# EAGLE board ProjBoard (EAGLE 9.7.0)
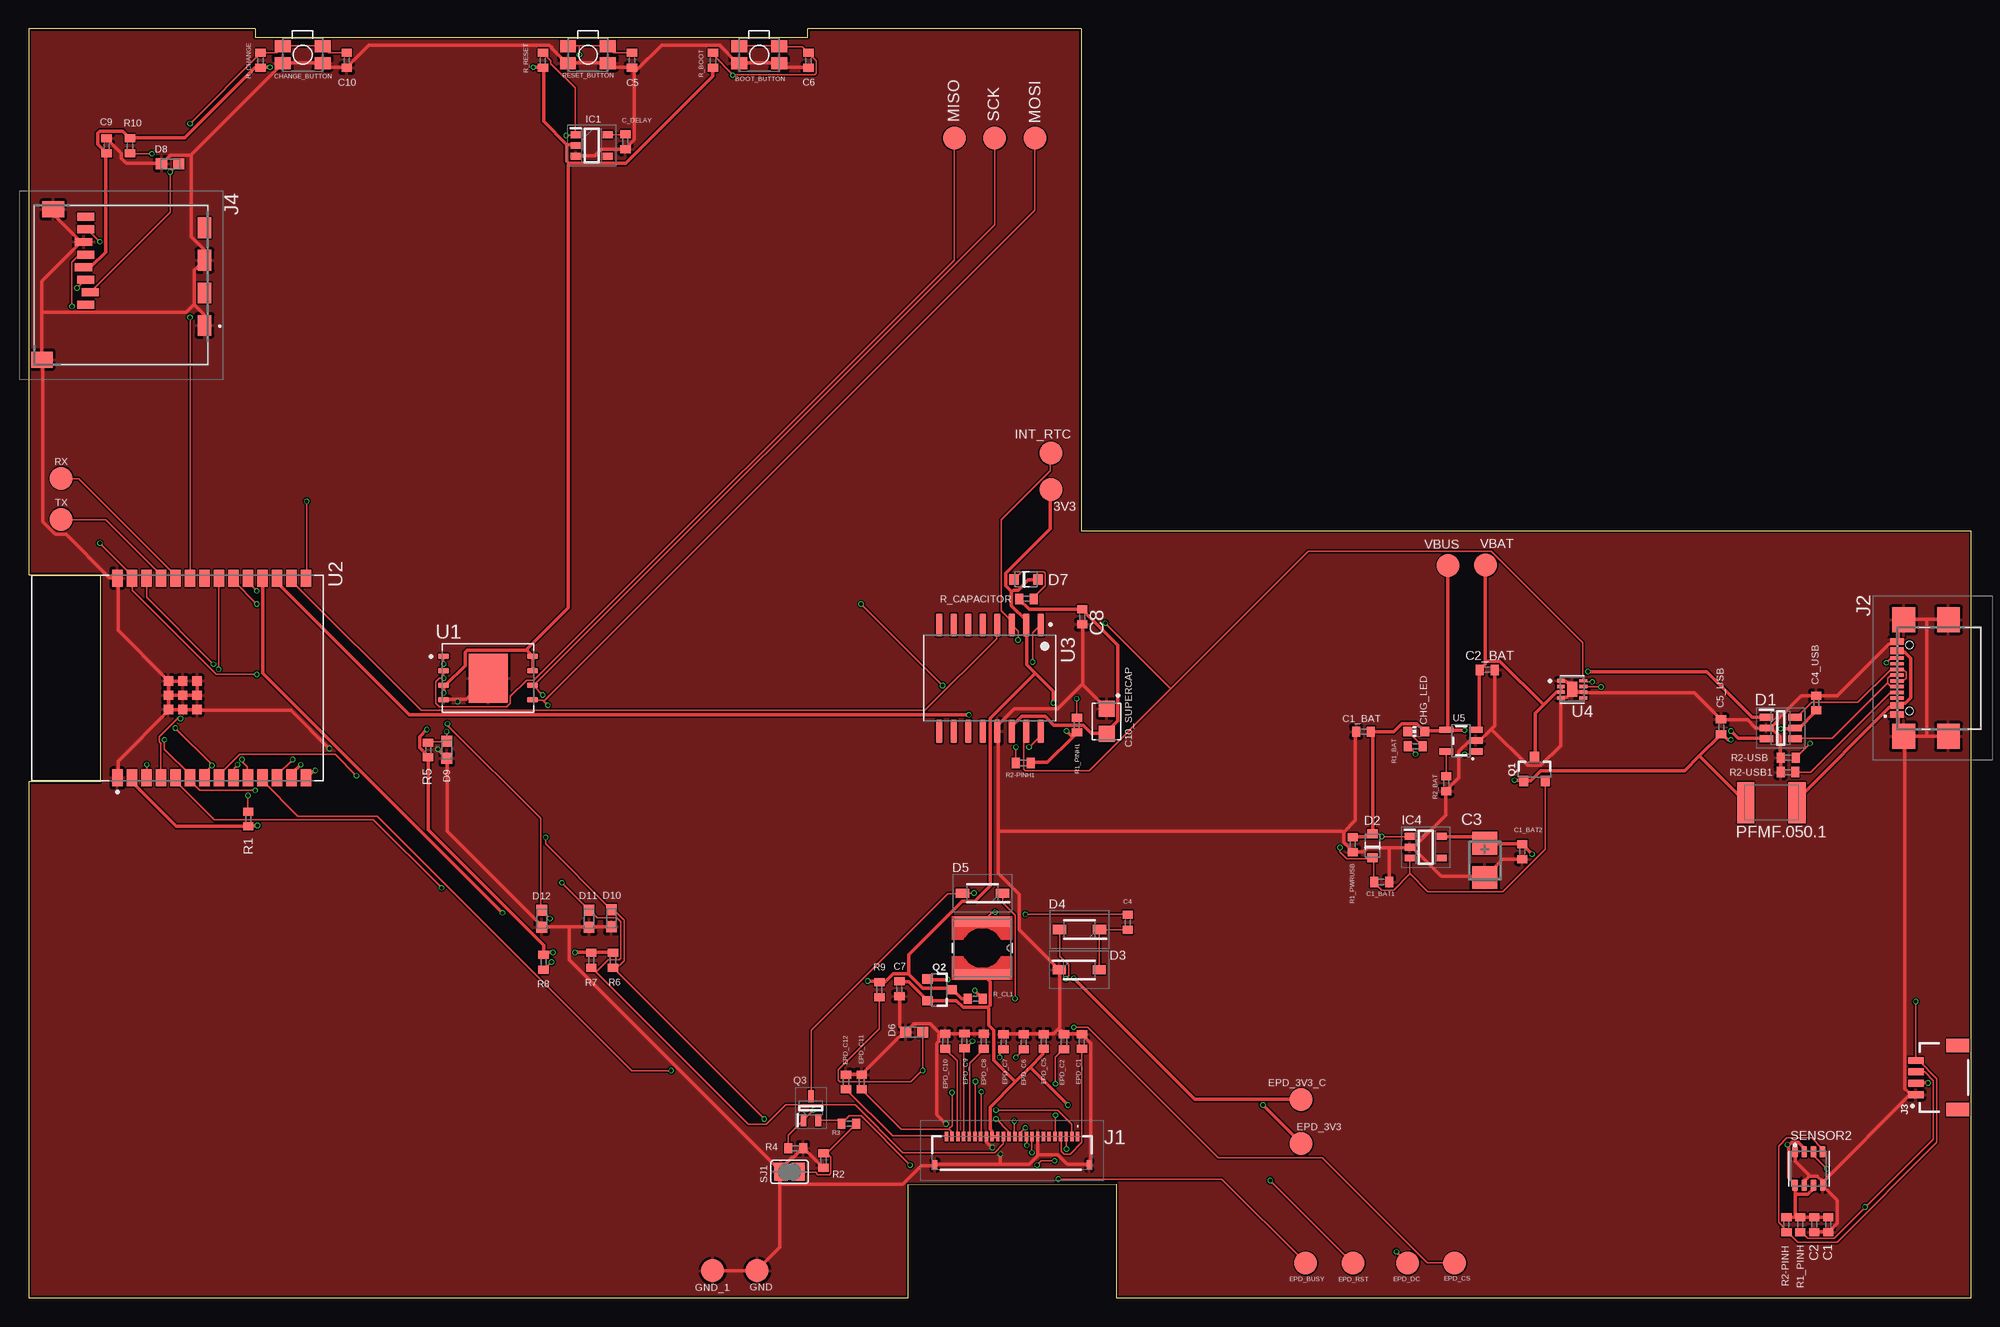
[diagram p0: board, top side]
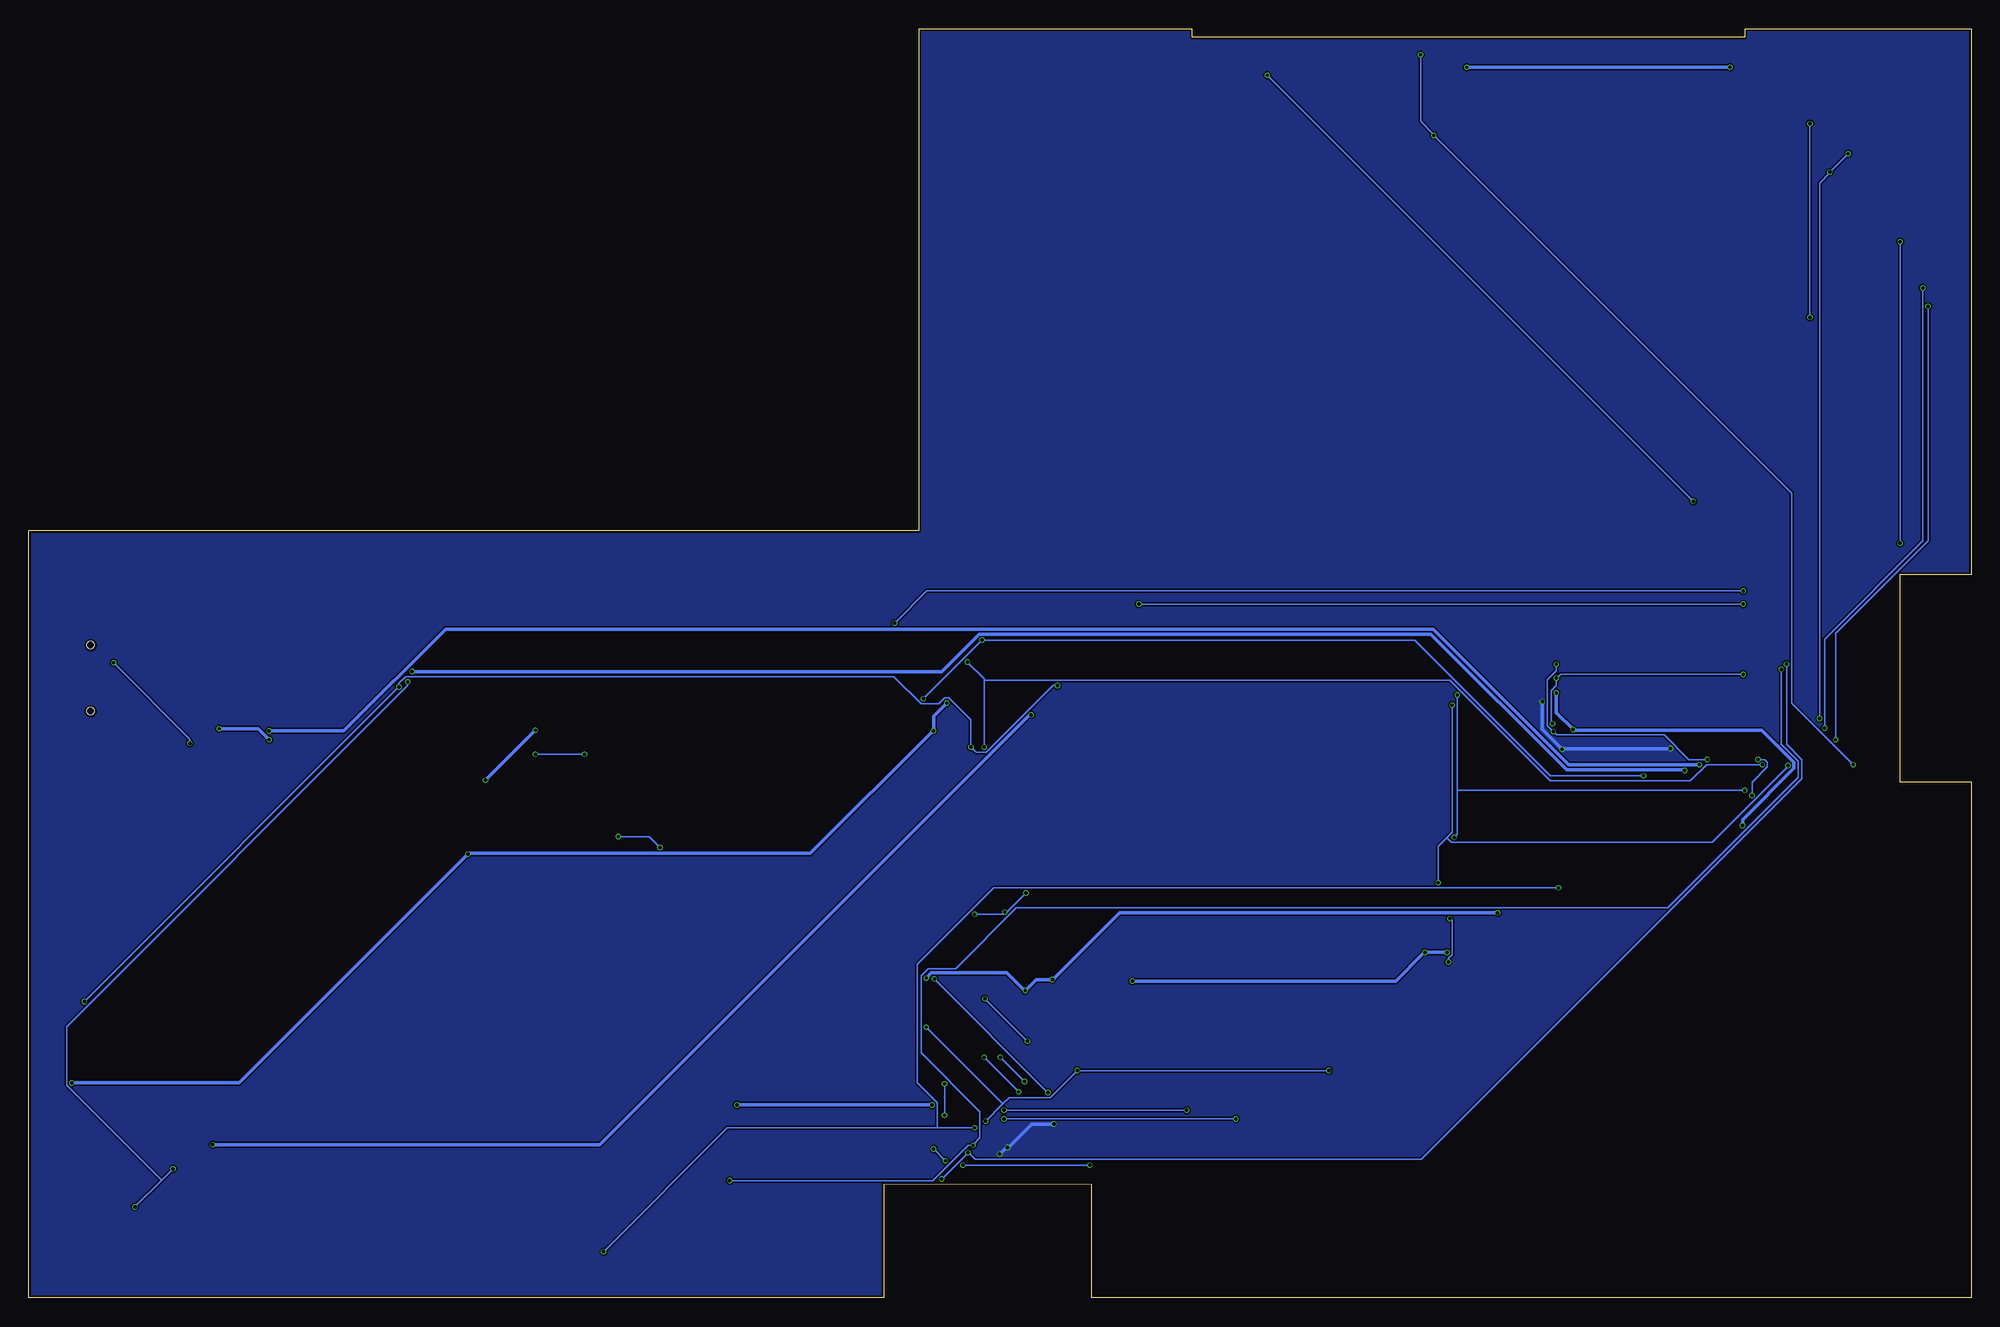
[diagram p1: board, bottom side, seen from below]

Size 170.21 x 111.21 mm. Coordinates in mm from the lower left corner, seen from the top.
Outline: 0,0.02 77.06,0.01 77.07,9.94 95.27,9.96 95.27,0.01 170.21,0 170.21,67.21 92.21,67.21 92.21,111.21 68.26,111.21 68.26,110.46 19.84,110.46 19.84,111.21 0.01,111.21 0.01,63.38 6.3,63.38 6.3,45.24 0.01,45.24 0,0.02
Copper layers (1*16): Top 0.035mm / dielectric 1.6mm / Bottom 0.035mm
Design rules "jlcpcb-2layers.dru": minimum track width 0.13mm, minimum drill 0.3mm, track to track 5mil, track to pad 5mil, pad to pad 5mil, via to via 5mil, smd to smd 5mil, copper to edge 0.2mm, drill to drill 6mil, minimum pad ring 10mil, minimum via ring 3mil, stop-mask expansion 4mil, vias tented up to drill 0mil, thermal gap 10mil
Net classes: 1 pow: width 0.3 mm; 2 rst: width 0.15 mm

## Footprints (pad centres in the part's own frame; a part is rotated, then mirrored left to right if it is on the bottom)
TP20R = smd 2 x 2: TP 0,0
MYBUTTON = smd 1.4 x 1.05: 1 1.75,0.75; 2 -1.75,0.75; 3 -1.75,-0.75; 4 1.75,-0.75
ESP32_WROVER_EAGLE-LTSPICE_C0402 = smd 0.7 x 0.9: 1 -0.65,0; 2 0.65,0
RCL_CT3528 = smd 2 x 2.2: + -1.5,0; - 1.5,0
CAPCP3225X100N = smd 1.4 x 1.4: 1 -1.1,0; 2 1.1,0
ADAFRUIT_CHIP-LED0603 = smd 0.8 x 0.8: A 0,-0.75; C 0,0.75
SOT95P280X145-6N = smd 1.2 x 0.6: 1 -1.25,0.95; 2 -1.25,0; 3 -1.25,-0.95; 4 1.25,-0.95; 5 1.25,0; 6 1.25,0.95
ESP32_WROVER_AVX---SD0805S020S1R0_AVX_SD0805S020S1R0_0 = smd 0.8 x 0.9: 1 -1.05,0; 2 1.05,0
SOD3716X135N = smd 1.15 x 0.8: 1 -1.75,0; 2 1.75,0
DIOC1608X36N = smd 0.97 x 0.94: 1 -0.75,0; 2 0.75,0
SOT95P280X125-5N = smd 0.9 x 0.6: 1 -1.4,0.95; 2 -1.4,0; 3 -1.4,-0.95; 4 1.4,-0.95; 5 1.4,0.95
SOT95P280X120-5N = smd 0.9 x 0.6: 1 -1.4,0.95; 2 -1.4,0; 3 -1.4,-0.95; 4 1.4,-0.95; 5 1.4,0.95
FH34SRJ24S05SH99 = smd 0.3 x 0.8: 1 5.75,1.45; 2 5.25,1.45; 3 4.75,1.45; 4 4.25,1.45; 5 3.75,1.45; 6 3.25,1.45; 7 2.75,1.45; 8 2.25,1.45; 9 1.75,1.45; 10 1.25,1.45; 11 0.75,1.45; 12 0.25,1.45; 13 -0.25,1.45; 14 -0.75,1.45; 15 -1.25,1.45; 16 -1.75,1.45; 17 -2.25,1.45; 18 -2.75,1.45; 19 -3.25,1.45; 20 -3.75,1.45; 21 -4.25,1.45; 22 -4.75,1.45; 23 -5.25,1.45; 24 -5.75,1.45 | smd 0.4 x 0.8: MP1 6.75,-1.05; MP2 -6.75,-1.05
SAMACSYS_PARTS_USB4110GFA = smd 0.3 x 1.15: A1 -3.35,3.678; A4 -2.55,3.678; A5 -1.25,3.678; A6 -0.25,3.678; A7 0.25,3.678; A8 1.25,3.678; A9 2.55,3.678; A12 3.35,3.678; B1 3.05,3.678; B4 2.25,3.678; B5 1.75,3.678; B6 0.75,3.678; B7 -0.75,3.678; B8 -1.75,3.678; B9 -2.25,3.678; B12 -3.05,3.678 | smd 2.18 x 2: MP1 -5.11,-0.827; MP2 5.11,-0.827; MP3 -5.11,3.103; MP4 5.11,3.103 | hole 0.65: -2.89,2.603; 2.89,2.603
JST04_1MM_RA = smd 0.6 x 1.35: 1 -1.5,0; 2 -0.5,0; 3 0.5,0; 4 1.5,0 | smd 1.2 x 2: NC1 2.8,-3.675; NC2 -2.8,-3.675
112ATAARR03ATTEND = smd 1.8 x 1.2: G1 10.6,10.4; G2 4.9,10.4; S1 7.75,10.4; S2 2.05,10.4 | smd 1.4 x 1.9: G3 13.6,-3.85; G4 0.45,-2.85 | smd 0.7 x 1.5: P1 8.8,0; P2 7.7,0.4; P3 6.6,0; P4 5.5,-0.2; P5 4.4,0; P6 3.3,-0.2; P7 2.2,0; P8 1.1,0
IND_4828-WE-TPC_WRE = smd 0.889 x 4.826: 1 -2.286,0; 2 2.286,0
ESP32C6_VARISTOR_CT/CN1812 = smd 1.5 x 3.6: 1 -2.25,0; 2 2.25,0
ESP32_WROVER_SPARKFUN-DISCRETESEMI_SOT23-3 = smd 0.8 x 0.9: 1 -0.95,-1; 2 0.95,-1; 3 0,1.1
SOT65P210X110-3N = smd 1.05 x 0.5: 1 -1.05,0.65; 2 -1.05,-0.65; 3 1.05,0
ESP32_WROVER_EAGLE-LTSPICE_R0402 = smd 0.7 x 0.9: 1 -0.65,0; 2 0.65,0
ESP32_WROVER_BME680_PSON80P300X300X100-8N = smd 1.016 x 0.5: 1 1.458,1.2; 2 1.458,0.4; 3 1.458,-0.4; 4 1.458,-1.2; 5 -1.458,-1.22; 6 -1.458,-0.4; 7 -1.458,0.4; 8 -1.458,1.2
SJ = smd 1.168 x 1.6: 1 -0.762,0; 2 0.762,0
SON127P600X800X80-9N = smd 0.94 x 0.44: 1 -3.895,1.905; 2 -3.895,0.635; 3 -3.895,-0.635; 4 -3.895,-1.905; 5 3.895,-1.905; 6 3.895,-0.635; 7 3.895,0.635; 8 3.895,1.905 | smd 3.4 x 4.3: 9 0,0
XCVR_ESP32-C6-WROOM-1-N8 = smd 1.5 x 0.9: 1 -8.75,5.26; 2 -8.75,3.99; 3 -8.75,2.72; 4 -8.75,1.45; 5 -8.75,0.18; 6 -8.75,-1.09; 7 -8.75,-2.36; 8 -8.75,-3.63; 9 -8.75,-4.9; 10 -8.75,-6.17; 11 -8.75,-7.44; 12 -8.75,-8.71; 13 -8.75,-9.98; 14 -8.75,-11.25; 15 8.75,-11.25; 16 8.75,-9.98; 17 8.75,-8.71; 18 8.75,-7.44; 19 8.75,-6.17; 20 8.75,-4.9; 21 8.75,-3.63; 22 8.75,-2.36; 23 8.75,-1.09; 24 8.75,0.18; 25 8.75,1.45; 26 8.75,2.72; 27 8.75,3.99; 28 8.75,5.26 | smd 0.8 x 0.8: 29_1 -2.755,0.79; 29_2 -1.505,0.79; 29_3 -0.255,0.79; 29_4 -2.755,-0.46; 29_5 -1.505,-0.46; 29_6 -0.255,-0.46; 29_7 -2.755,-1.71; 29_8 -1.505,-1.71; 29_9 -0.255,-1.71
SOIC127P1032X265-16N = smd 2.05 x 0.59: 1 -4.655,4.445; 2 -4.655,3.175; 3 -4.655,1.905; 4 -4.655,0.635; 5 -4.655,-0.635; 6 -4.655,-1.905; 7 -4.655,-3.175; 8 -4.655,-4.445; 9 4.655,-4.445; 10 4.655,-3.175; 11 4.655,-1.905; 12 4.655,-0.635; 13 4.655,0.635; 14 4.655,1.905; 15 4.655,3.175; 16 4.655,4.445
SON50P200X200X80-9N = smd 0.76 x 0.3: 1 -0.985,0.75; 2 -0.985,0.25; 3 -0.985,-0.25; 4 -0.985,-0.75; 6 0.985,-0.25 | smd 0.76 x 0.27: 5 0.985,-0.75; 7 0.985,0.25; 8 0.985,0.75 | smd 0.9 x 1.3: 9 0,0
ESP32_WROVER_SPARKFUN-IC-POWER_SOT23-5 = smd 0.55 x 1.2: 1 -0.95,-1.3; 2 0,-1.3; 3 0.95,-1.3; 4 0.95,1.3; 5 -0.95,1.3

## Placement (x,y rotation side)
3V3  TPTP20R  [TP20R]  89.57,70.82 0 top
BOOT_BUTTON  BUTTON_CUSYOMV1  [MYBUTTON]  64.01,108.92 180 top
C1  100nF  [ESP32_WROVER_EAGLE-LTSPICE_C0402]  157.67,6.43 270 top
C1_BAT  4.7uF  [ESP32_WROVER_EAGLE-LTSPICE_C0402]  116.95,49.61 180 top
C1_BAT1  4.7uF  [ESP32_WROVER_EAGLE-LTSPICE_C0402]  118.54,36.44 0 top
C1_BAT2  4.7uF  [ESP32_WROVER_EAGLE-LTSPICE_C0402]  130.86,39.1 270 top
C2  100nF  [ESP32_WROVER_EAGLE-LTSPICE_C0402]  156.43,6.43 270 top
C2_BAT  4.7uF  [ESP32_WROVER_EAGLE-LTSPICE_C0402]  127.8,55.02 0 top
C3  100uF TANT  [RCL_CT3528]  127.58,38.33 270 top
C4  4.7uF/25V  [ESP32_WROVER_EAGLE-LTSPICE_C0402]  96.3,32.91 90 top
C4_USB  100nF  [ESP32_WROVER_EAGLE-LTSPICE_C0402]  156.62,52.12 90 top
C5  1uF  [ESP32_WROVER_EAGLE-LTSPICE_C0402]  52.87,108.42 270 top
C5_USB  4.7uF  [ESP32_WROVER_EAGLE-LTSPICE_C0402]  148.28,50.03 90 top
C6  100nF  [ESP32_WROVER_EAGLE-LTSPICE_C0402]  68.33,108.42 270 top
C7  10uF  [ESP32_WROVER_EAGLE-LTSPICE_C0402]  76.29,27.08 270 top
C8  100nF  [ESP32_WROVER_EAGLE-LTSPICE_C0402]  92.32,59.67 270 top
C9  100nF  [ESP32_WROVER_EAGLE-LTSPICE_C0402]  6.84,100.93 90 top
C10  100nF  [ESP32_WROVER_EAGLE-LTSPICE_C0402]  27.87,108.42 270 top
C10_SUPERCAP  CPH3225A  [CAPCP3225X100N]  94.44,50.52 270 top
C_DELAY  100nF  [ESP32_WROVER_EAGLE-LTSPICE_C0402]  52.29,101.29 270 top
CHANGE_BUTTON  BUTTON_CUSYOMV1  [MYBUTTON]  24.01,108.92 180 top
CHG_LED  [ADAFRUIT_CHIP-LED0603]  121.57,49.63 90 top
D1  USBLC6-2SC6Y  [SOT95P280X145-6N]  153.5,49.93 0 top
D2  ESP32_WROVER_AVX---SD0805S020S1R0_AVX_SD0805S020S1R0_0_0AVX_SD0805S020S1R0_0_0  [ESP32_WROVER_AVX---SD0805S020S1R0_AVX_SD0805S020S1R0_0]  117.74,39.62 90 top
D3  MBR0530  [SOD3716X135N]  92.04,28.74 0 top
D4  MBR0530  [SOD3716X135N]  92.07,32.28 180 top
D5  MBR0530  [SOD3716X135N]  83.57,35.46 180 top
D6  PGB1010603MR  [DIOC1608X36N]  77.58,23.28 0 top
D7  ESP32_WROVER_AVX---SD0805S020S1R0_AVX_SD0805S020S1R0_0_0AVX_SD0805S020S1R0_0_0  [ESP32_WROVER_AVX---SD0805S020S1R0_AVX_SD0805S020S1R0_0]  87.38,62.95 0 top
D8  PGB1010603MR  [DIOC1608X36N]  12.4,99.36 0 top
D9  PGB1010603MR  [DIOC1608X36N]  36.64,48.02 90 top
D10  PGB1010603MR  [DIOC1608X36N]  51.06,33.26 90 top
D11  PGB1010603MR  [DIOC1608X36N]  49.1,33.21 90 top
D12  PGB1010603MR  [DIOC1608X36N]  44.96,33.22 90 top
EPD_3V3  TPTP20R  [TP20R]  111.49,13.53 0 top
EPD_3V3_C  TPTP20R  [TP20R]  111.49,17.38 0 top
EPD_BUSY  TPTP20R  [TP20R]  111.87,3.06 0 top
EPD_C1  1uF/50V  [ESP32_WROVER_EAGLE-LTSPICE_C0402]  92.28,22.47 90 top
EPD_C2  1uF/50V  [ESP32_WROVER_EAGLE-LTSPICE_C0402]  90.71,22.45 90 top
EPD_C5  0.1uF/50V  [ESP32_WROVER_EAGLE-LTSPICE_C0402]  88.93,22.47 270 top
EPD_C6  1uF/50V  [ESP32_WROVER_EAGLE-LTSPICE_C0402]  87.18,22.44 270 top
EPD_C7  1uF/50V  [ESP32_WROVER_EAGLE-LTSPICE_C0402]  85.42,22.44 270 top
EPD_C8  1uF/50V  [ESP32_WROVER_EAGLE-LTSPICE_C0402]  83.68,22.49 270 top
EPD_C9  1uF/50V  [ESP32_WROVER_EAGLE-LTSPICE_C0402]  81.99,22.52 270 top
EPD_C10  1uF/50V  [ESP32_WROVER_EAGLE-LTSPICE_C0402]  80.3,22.49 270 top
EPD_C11  1uF/50V  [ESP32_WROVER_EAGLE-LTSPICE_C0402]  72.99,18.92 270 top
EPD_C12  1uF/50V  [ESP32_WROVER_EAGLE-LTSPICE_C0402]  71.61,18.92 270 top
EPD_CS  TPTP20R  [TP20R]  124.93,3.06 0 top
EPD_DC  TPTP20R  [TP20R]  120.82,3.06 0 top
EPD_RST  TPTP20R  [TP20R]  116.04,3.06 0 top
GND  TPTP20R  [TP20R]  63.83,2.39 0 top
GND_1  TPTP20R  [TP20R]  59.92,2.39 0 top
IC1  BD5229G-TR  [SOT95P280X125-5N]  49.34,100.96 0 top
IC4  XC6220A331MR-G  [SOT95P280X120-5N]  122.4,39.5 0 top
INT_RTC  TPTP20R  [TP20R]  89.57,74.02 0 top
J1  FH34SRJ-24S-0.5SH_99_  [FH34SRJ24S05SH99]  86.16,12.7 0 top
J2  SAMACSYS_PARTS_USB4110-GF-A  [SAMACSYS_PARTS_USB4110GFA]  167.37,54.31 90 top
J3  QWIIC_RIGHT_ANGLE  [JST04_1MM_RA]  165.33,19.31 90 top
J4  112A-TAAR-R03_ATTEND  [112ATAARR03ATTEND]  5.02,95.81 270 top
L1  68uH  [IND_4828-WE-TPC_WRE]  83.54,30.66 270 top
MISO  TPTP20R  [TP20R]  81.11,101.6 90 top
MOSI  TPTP20R  [TP20R]  88.19,101.6 90 top
PFMF.050.1  ESP32C6_VARISTORCN1812  [ESP32C6_VARISTOR_CT/CN1812]  152.68,43.4 180 top
Q1  20V/4.2A/52mΩ/1.4W  [ESP32_WROVER_SPARKFUN-DISCRETESEMI_SOT23-3]  131.93,46.29 0 top
Q2  20V/4.2A/52mΩ/1.4W  [ESP32_WROVER_SPARKFUN-DISCRETESEMI_SOT23-3]  79.76,27 270 top
Q3  SI1308EDL-T1-GE3  [SOT65P210X110-3N]  68.54,16.64 90 top
R1  10K  [ESP32_WROVER_EAGLE-LTSPICE_R0402]  19.25,41.96 90 top
R1_BAT  200  [ESP32_WROVER_EAGLE-LTSPICE_R0402]  121.49,48.33 0 top
R1_PINH  10K  [ESP32_WROVER_EAGLE-LTSPICE_R0402]  155.22,6.43 90 top
R1_PINH1  10K  [ESP32_WROVER_EAGLE-LTSPICE_R0402]  91.84,50.19 270 top
R1_PWRUSB  100K  [ESP32_WROVER_EAGLE-LTSPICE_R0402]  116,39.72 90 top
R2  2.2  [ESP32_WROVER_EAGLE-LTSPICE_R0402]  69.64,12.05 90 top
R2-PINH  10K  [ESP32_WROVER_EAGLE-LTSPICE_R0402]  154,6.43 90 top
R2-PINH1  10K  [ESP32_WROVER_EAGLE-LTSPICE_R0402]  87.14,46.87 0 top
R2-USB  5k1  [ESP32_WROVER_EAGLE-LTSPICE_R0402]  154.15,47.33 180 top
R2-USB1  5K1  [ESP32_WROVER_EAGLE-LTSPICE_R0402]  154.14,46.07 0 top
R2_BAT  2K  [ESP32_WROVER_EAGLE-LTSPICE_R0402]  124.2,45.06 90 top
R3  0.47  [ESP32_WROVER_EAGLE-LTSPICE_R0402]  71.87,15.27 0 top
R4  10K  [ESP32_WROVER_EAGLE-LTSPICE_R0402]  67.21,13.12 0 top
R5  10K  [ESP32_WROVER_EAGLE-LTSPICE_R0402]  35,48.01 270 top
R6  10K  [ESP32_WROVER_EAGLE-LTSPICE_R0402]  51.2,29.59 90 top
R7  10K  [ESP32_WROVER_EAGLE-LTSPICE_R0402]  49.3,29.59 90 top
R8  10K  [ESP32_WROVER_EAGLE-LTSPICE_R0402]  45.12,29.41 90 top
R9  10K  [ESP32_WROVER_EAGLE-LTSPICE_R0402]  74.54,27 90 top
R10  10K  [ESP32_WROVER_EAGLE-LTSPICE_R0402]  8.89,100.93 90 top
R_BOOT  10K  [ESP32_WROVER_EAGLE-LTSPICE_R0402]  59.96,108.42 90 top
R_CAPACITOR  15  [ESP32_WROVER_EAGLE-LTSPICE_R0402]  87.42,61.24 0 top
R_CHANGE  10K  [ESP32_WROVER_EAGLE-LTSPICE_R0402]  20.32,108.42 90 top
R_CL1  10K  [ESP32_WROVER_EAGLE-LTSPICE_R0402]  82.95,26.22 0 top
R_RESET  10K  [ESP32_WROVER_EAGLE-LTSPICE_R0402]  45.06,108.42 90 top
RESET_BUTTON  BUTTON_CUSYOMV1  [MYBUTTON]  49.01,108.92 180 top
RX  TPTP20R  [TP20R]  2.86,71.81 0 top
SCK  TPTP20R  [TP20R]  84.63,101.6 90 top
SENSOR2  BME688  [ESP32_WROVER_BME680_PSON80P300X300X100-8N]  155.96,11.34 90 top
SJ1  [SJ]  66.67,11.05 0 top
TX  TPTP20R  [TP20R]  2.86,68.22 0 top
U1  W25Q512JVEIQ  [SON127P600X800X80-9N]  40.26,54.31 0 top
U2  ESP32-C6-WROOM-1-N8  [XCVR_ESP32-C6-WROOM-1-N8]  13.05,54.31 90 top
U3  DS3231SN#  [SOIC127P1032X265-16N]  84.22,54.31 270 top
U4  MAX17048G+T10  [SON50P200X200X80-9N]  135.23,53.32 0 top
U5  MCP73831  [ESP32_WROVER_SPARKFUN-IC-POWER_SOT23-5]  125.5,48.83 90 top
VBAT  TPTP20R  [TP20R]  127.64,64.2 0 top
VBUS  TPTP20R  [TP20R]  124.37,64.19 0 top

## Library data of the parts
3V3 BOOT_BUTTON CHANGE_BUTTON CHG_LED EPD_3V3 EPD_3V3_C EPD_BUSY EPD_CS EPD_DC EPD_RST GND GND_1 INT_RTC MISO MOSI PFMF.050.1 RESET_BUTTON RX SCK SJ1 TX VBAT VBUS = ProjectLib
C1 C1_BAT C1_BAT1 C1_BAT2 C2 C2_BAT C4 C4_USB C5 C5_USB C6-C10 C_DELAY EPD_C1 EPD_C2 EPD_C5-EPD_C12 = ProjectLib; SPICEMODEL: NONE; SPICEPREFIX: C
C3 = ProjectLib; SPICEPREFIX: C
C10_SUPERCAP = ProjectLib; AVAILABILITY: Not in stock; CHECK_PRICES: https://www.snapeda.com/parts/CPH3225A/Seiko+Instruments/view-part/?ref=eda; DESCRIPTION: 11 mF (EDLC) Supercapacitor 3.3 V 1210 (3225 Metric) - -; MF: Seiko Instruments; MP: CPH3225A; PACKAGE: 1210 Seiko; PRICE: None; PURCHASE-URL: https://www.snapeda.com/api/url_track_click_mouser/?unipart_id=562593&manufacturer=Seiko Instruments&part_name=CPH3225A&search_term=None; SNAPEDA_LINK: https://www.snapeda.com/parts/CPH3225A/Seiko+Instruments/view-part/?ref=snap
D1 = ProjectLib; AVAILABILITY: In Stock; CHECK_PRICES: https://www.snapeda.com/parts/USBLC6-2SC6Y/STMicroelectronics/view-part/?ref=eda; DESCRIPTION: 17V Clamp 5A (8/20µs) Ipp Tvs Diode Surface Mount SOT-23-6; MF: STMicroelectronics; MP: USBLC6-2SC6Y; PACKAGE: SOT-23-6 STMicroelectronics; PRICE: None; SNAPEDA_LINK: https://www.snapeda.com/parts/USBLC6-2SC6Y/STMicroelectronics/view-part/?ref=snap
D2 D7 = ProjectLib; CENTROID_NOT_SPECIFIED: No; DATASHEET: http://datasheets.avx.com/schottky.pdf; DIGIKEY_DESCRIPTION: DIODE SCHOTTKY 20V 1A 0805; DIGIKEY_PART_NUMBER: 478-7800-1-ND; LEAD_FREE: yes; MF: AVX; MOUSER_PART_NUMBER: 581-SD0805S020S1R0; PACKAGE: 0805 (2012 metric); PREFIX: D; ROHS: yes; TEMPERATURE_RANGE_HIGH: +125°C; TEMPERATURE_RANGE_LOW: -55°C
D3-D5 = ProjectLib; AVAILABILITY: In Stock; CHECK_PRICES: https://www.snapeda.com/parts/MBR0530/Onsemi/view-part/?ref=eda; DESCRIPTION: Diode Schottky 30 V 500mA Surface Mount SOD-123; MF: ON Semiconductor; MP: MBR0530; PACKAGE: SOD-123-2 ON Semiconductor; PRICE: None; PURCHASE-URL: https://www.snapeda.com/api/url_track_click_mouser/?unipart_id=179458&manufacturer=ON Semiconductor&part_name=MBR0530&search_term=None; SNAPEDA_LINK: https://www.snapeda.com/parts/MBR0530/Onsemi/view-part/?ref=snap
D6 D8-D12 = ProjectLib; AVAILABILITY: In Stock; CHECK_PRICES: https://www.snapeda.com/parts/PGB1010603MR/Littelfuse/view-part/?ref=eda; DESCRIPTION: 150V (Typ) Clamp - Ipp Tvs Diode Surface Mount 0603 (1608 Metric); MF: Littelfuse Inc.; MP: PGB1010603MR; PACKAGE: 0603 Littelfuse Inc.; PRICE: None; PURCHASE-URL: https://www.snapeda.com/api/url_track_click_mouser/?unipart_id=5659453&manufacturer=Littelfuse Inc.&part_name=PGB1010603MR&search_term=None; SNAPEDA_LINK: https://www.snapeda.com/parts/PGB1010603MR/Littelfuse/view-part/?ref=snap
IC1 = ProjectLib; DESCRIPTION: Voltage Detector with Adjustable Delay Time: CMOS processes are utilized to develop high precision, low current consumption CMOS reset ICs that allow arbitrary setting of the delay time. The extensive lineup includes both Nch Open Drain and CMOS output types in a wide range of detection voltages (from 2.3V to 6.0V, in 0.1V steps), enabling selection of the ideal solution based on customer requirements. In addition, the entire series is of course both lead-free and RoHS-compliant.; HEIGHT: 1.25mm; MANUFACTURER_NAME: ROHM Semiconductor; MANUFACTURER_PART_NUMBER: BD5229G-TR; MOUSER_PART_NUMBER: 755-BD5229G-TR; MOUSER_PRICE-STOCK: https://www.mouser.co.uk/ProductDetail/ROHM-Semiconductor/BD5229G-TR?qs=4kLU8WoGk0vvnhrrYwdszw%3D%3D
IC4 = ProjectLib; DESCRIPTION: LDO Voltage Regulators; HEIGHT: 1.2mm; MANUFACTURER_NAME: Torex; MANUFACTURER_PART_NUMBER: XC6220A331MR-G; MOUSER_PART_NUMBER: 865-XC6220A331MR-G; MOUSER_PRICE-STOCK: https://www.mouser.co.uk/ProductDetail/Torex-Semiconductor/XC6220A331MR-G?qs=AsjdqWjXhJ8ZSWznL1J0gg%3D%3D
J1 = ProjectLib; DESCRIPTION: 24 Position FFC, FPC Connector Contacts, Top and Bottom 0.020" (0.50mm) Surface Mount, Right Angle; HEIGHT: 1.1mm; MANUFACTURER_NAME: Hirose; MANUFACTURER_PART_NUMBER: FH34SRJ-24S-0.5SH(99); MOUSER_PART_NUMBER: 798-FH34SRJ24S05SH99; MOUSER_PRICE-STOCK: https://www.mouser.co.uk/ProductDetail/Hirose-Connector/FH34SRJ-24S-0.5SH99?qs=vcbW%252B4%252BSTIpKBl5ap9J8Fw%3D%3D
J2 = ProjectLib; DESCRIPTION: CONN USB 2.0 TYPE-C R/A SMT; HEIGHT: 3.26mm; MANUFACTURER_NAME: GCT (GLOBAL CONNECTOR TECHNOLOGY); MANUFACTURER_PART_NUMBER: USB4110-GF-A; MOUSER_PART_NUMBER: 640-USB4110-GF-A; MOUSER_PRICE-STOCK: https://www.mouser.co.uk/ProductDetail/GCT/USB4110-GF-A?qs=KUoIvG%2F9IlYiZvIXQjyJeA%3D%3D
J3 = ProjectLib; PROD_ID: CONN-13694
J4 = ProjectLib; DESCRIPTION: Micro SD Card Socket, Push-Push Type, Top Mount, SMT, H=1.83mm, 10u; HEIGHT: 1.9mm; MANUFACTURER_NAME: ATTEND; MANUFACTURER_PART_NUMBER: 112A-TAAR-R03 ATTEND
L1 = ProjectLib; COPYRIGHT: Copyright (C) 2024 Ultra Librarian. All rights reserved.; MANUFACTURER_PART_NUMBER: 744043680; MFR_NAME: Wurth Electronics
Q1 Q2 = ProjectLib; PROD_ID: TRAN-14388
Q3 = ProjectLib; AVAILABILITY: In Stock; CHECK_PRICES: https://www.snapeda.com/parts/SI1308EDL-T1-GE3/Vishay+Siliconix/view-part/?ref=eda; DESCRIPTION: Si1308EDL-T1-GE3 N-channel MOSFET Transistor, 1.5 A, 30 V, 3-Pin SC-70 | Siliconix / Vishay SI1308EDL-T1-GE3; MF: Vishay Siliconix; MP: SI1308EDL-T1-GE3; PACKAGE: SOT-323 Vishay Semiconductor; PRICE: None; PURCHASE-URL: https://www.snapeda.com/api/url_track_click_mouser/?unipart_id=274603&manufacturer=Vishay Siliconix&part_name=SI1308EDL-T1-GE3&search_term=None; SNAPEDA_LINK: https://www.snapeda.com/parts/SI1308EDL-T1-GE3/Vishay+Siliconix/view-part/?ref=snap
R1 R1_BAT R1_PINH R1_PINH1 R1_PWRUSB R2 R2-PINH R2-PINH1 R2-USB R2-USB1 R2_BAT R3-R10 R_BOOT R_CAPACITOR R_CHANGE R_CL1 R_RESET = ProjectLib; SPICEMODEL: NONE; SPICEPREFIX: R
SENSOR2 = ProjectLib; AVAILABILITY: Unavailable; DESCRIPTION: Integrated Environmental Unit; MF: Bosch Sensortec; MP: BME680; PACKAGE: LGA-8 Bosch Tools; PRICE: None
U1 = ProjectLib; AVAILABILITY: In Stock; CHECK_PRICES: https://www.snapeda.com/parts/W25Q512JVEIQ/Winbond+Electronics/view-part/?ref=eda; DESCRIPTION: FLASH - NOR Memory IC 512Mb (64M x 8) SPI - Quad I/O 133 MHz 8-WSON (8x6); MF: Winbond Electronics; MP: W25Q512JVEIQ; PACKAGE: Package; PRICE: None; SNAPEDA_LINK: https://www.snapeda.com/parts/W25Q512JVEIQ/Winbond+Electronics/view-part/?ref=snap
U2 = ProjectLib; AVAILABILITY: In Stock; CHECK_PRICES: https://www.snapeda.com/parts/ESP32-C6-WROOM-1-N8/Espressif+Systems/view-part/?ref=eda; DESCRIPTION: Multiprotocol Modules ESP32-C6 module, Wi-Fi 6 in 2.4 GHz band, Bluetooth 5, Zigbee 3.0 and Thread. ESP34-WROOM Compatible - ENGINEERING SAMPLE; MF: Espressif Systems; MP: ESP32-C6-WROOM-1-N8; PACKAGE: None; PRICE: None; SNAPEDA_LINK: https://www.snapeda.com/parts/ESP32-C6-WROOM-1-N8/Espressif+Systems/view-part/?ref=snap
U3 = ProjectLib; AVAILABILITY: In Stock; CHECK_PRICES: https://www.snapeda.com/parts/DS3231SN%23/Analog+Devices/view-part/?ref=eda; DESCRIPTION: Extremely Accurate I²C-Integrated RTC/TCXO/Crystal; MF: Analog Devices; MP: DS3231SN#; PACKAGE: SOIC-16 Maxim; PRICE: None; PURCHASE-URL: https://www.snapeda.com/api/url_track_click_mouser/?unipart_id=99048&manufacturer=Analog Devices&part_name=DS3231SN#&search_term=None; SNAPEDA_LINK: https://www.snapeda.com/parts/DS3231SN%23/Analog+Devices/view-part/?ref=snap
U4 = ProjectLib; AVAILABILITY: In Stock; CHECK_PRICES: https://www.snapeda.com/parts/MAX17048G+T10/Analog+Devices/view-part/?ref=eda; DESCRIPTION: 3µA 1-Cell/2-Cell Fuel Gauge with ModelGauge; MF: Analog Devices; MP: MAX17048G+T10; PACKAGE: TDFN-8 Maxim; PRICE: None; PURCHASE-URL: https://www.snapeda.com/api/url_track_click_mouser/?unipart_id=329239&manufacturer=Analog Devices&part_name=MAX17048G+T10&search_term=None; SNAPEDA_LINK: https://www.snapeda.com/parts/MAX17048G+T10/Analog+Devices/view-part/?ref=snap
U5 = ProjectLib; PROD_ID: IC-09995

## Nets
3V3 [pow]: 3V3.TP C1_BAT2.1 C3.+ C9.1 D7.2 IC1.2 IC4.5 J3.2 J4.P4 Q2.3 R1.1 R1_PINH1.2 R2-PINH1.2 R5.2 R6.2 R7.2 R8.2 R9.2 R10.2 R_BOOT.1 R_CHANGE.1 R_CL1.1 R_RESET.1 U1.3 U1.7 U1.8 U2.2 U3.2
32KHZ [rst]: R2-PINH1.1 U2.9 U3.1
DN [rst]: D1.4 J2.A7 J2.B7
DP [rst]: D1.6 J2.A6 J2.B6
EPD_3V3 [pow]: C7.1 EPD_3V3.TP EPD_C5.2 J1.15 J1.16 L1.2 Q2.2
EPD_3V3_C [pow]: EPD_3V3_C.TP Q2.1 R_CL1.2 U2.18
EPD_BUSY [rst]: EPD_BUSY.TP J1.9 U2.26
EPD_CS [rst]: D6.2 EPD_CS.TP J1.12 R9.1 U2.11
EPD_DC [rst]: EPD_DC.TP J1.11 U2.5
EPD_RST [rst]: EPD_RST.TP J1.10 U2.21
FLASH_CS [rst]: D9.2 R5.1 U1.1 U2.12
GDR [rst]: J1.2 Q3.1 R4.1
GND [pow]: BOOT_BUTTON.1 BOOT_BUTTON.2 C1.2 C1_BAT1.2 C1_BAT2.2 C1_BAT.2 C2.2 C2_BAT.2 C3.- C4_USB.2 C5.2 C5_USB.2 C6.2 C7.2 C8.2 C9.2 C10.2 C10_SUPERCAP.1 C_DELAY.2 CHANGE_BUTTON.1 CHANGE_BUTTON.2 D1.2 D3.1 D6.1 D8.1 D9.1 D10.1 D11.1 D12.1 EPD_C1.2 EPD_C2.2 EPD_C5.1 EPD_C6.1 EPD_C7.1 EPD_C8.1 EPD_C9.1 EPD_C10.1 EPD_C11.1 EPD_C12.1 GND.TP GND_1.TP IC1.3 IC4.2 J1.8 J1.17 J1.MP1 J1.MP2 J2.A1 J2.A12 J2.B1 J2.B12 J2.MP1 J2.MP2 J2.MP3 J2.MP4 J3.1 J4.G1 J4.G2 J4.G3 J4.G4 J4.P6 R1_PWRUSB.1 R2-USB1.1 R2-USB.2 R2.1 R2_BAT.1 R4.2 RESET_BUTTON.1 RESET_BUTTON.2 SENSOR2.1 SENSOR2.5 SENSOR2.7 SJ1.1 U1.4 U1.9 U2.1 U2.28 U2.29_1 U2.29_2 U2.29_3 U2.29_4 U2.29_5 U2.29_6 U2.29_7 U2.29_8 U2.29_9 U3.13 U4.1 U4.4 U4.6 U4.9 U5.2
GPIO8 [rst]: R1.2 U2.10
I2C_PW [pow]: C1.1 C2.1 R1_PINH.2 R2-PINH.2 SENSOR2.2 SENSOR2.6 SENSOR2.8 U2.17
INT_RTC [rst]: INT_RTC.TP R1_PINH1.1 U2.8 U3.3
IO/BOOT [rst]: BOOT_BUTTON.3 BOOT_BUTTON.4 C6.1 R_BOOT.2 U2.15
IO/CHANGE [rst]: C10.1 CHANGE_BUTTON.3 CHANGE_BUTTON.4 R_CHANGE.2 U2.23
MISO [rst]: D12.2 J4.P7 MISO.TP R8.1 U1.2 U2.27
MOSI [rst]: D11.2 J1.14 J4.P3 MOSI.TP R7.1 U1.5 U2.7
N$1 [rst]: J2.B5 R2-USB.1
N$2 [rst]: J2.A5 R2-USB1.2
N$3 [rst]: C1_BAT1.1 D2.1 IC4.1 IC4.3 Q1.2
N$4 [rst]: C4.1 D3.2 D4.1
N$5 [rst]: CHG_LED.C R1_BAT.2
N$6 [rst]: R1_BAT.1 U5.1
N$7 [rst]: EPD_C10.2 J1.22
N$8 [rst]: R2_BAT.2 U5.5
N$9 [rst]: C_DELAY.1 IC1.5
N$10 [rst]: EPD_C1.1 J1.4
N$11 [rst]: EPD_C2.1 J1.5
N$12 [rst]: D7.1 R_CAPACITOR.2
N$19 [rst]: EPD_C6.2 J1.18
N$20 [rst]: EPD_C7.2 J1.19
N$21 [rst]: EPD_C8.2 J1.20
N$25 [rst]: EPD_C12.2 J1.24
PREVGH [rst]: D5.1 EPD_C9.2 J1.21
PREVGL [rst]: D4.2 EPD_C11.2 J1.23
RESE [rst]: J1.3 Q3.2 R3.1
RESE' [rst]: R2.2 R3.2 SJ1.2
RESET [rst]: C5.1 IC1.1 R_RESET.2 RESET_BUTTON.3 RESET_BUTTON.4 U2.3
RTC_RST [rst]: U2.16 U3.4
RX [rst]: RX.TP U2.24
SCK [rst]: D10.2 J1.13 J4.P5 R6.1 SCK.TP U1.6 U2.6
SCL [rst]: J3.4 R2-PINH.1 SENSOR2.4 U2.20 U3.16 U4.7
SDA [rst]: J3.3 R1_PINH.1 SENSOR2.3 U2.19 U3.15 U4.8
SRC [rst]: C4.2 D5.2 L1.1 Q3.3
SS_SD [rst]: D8.2 J4.P2 R10.1 U2.4
TX [rst]: TX.TP U2.25
USB_D+ [pow]: D1.1 U2.14
USB_D- [pow]: D1.3 U2.13
VBAT [pow]: C2_BAT.1 Q1.3 U4.2 U4.3 U5.3 VBAT.TP
VBUS [pow]: C1_BAT.1 C4_USB.1 C5_USB.1 CHG_LED.A D1.5 D2.2 PFMF.050.1.2 Q1.1 R1_PWRUSB.2 U5.4 VBUS.TP
VRTC [pow]: C8.1 C10_SUPERCAP.2 R_CAPACITOR.1 U3.14
VUSB [pow]: J2.A4 J2.A9 J2.B4 J2.B9 PFMF.050.1.1

## Tracks (layer width: path | path; a pad name or v marks a point on that pad's centre or on a via)
3V3  (via drill 0.3)
  Top 0.3: IC4.5 123.82,40.42 126.97,40.42 127.55,39.84 C3.+ 127.68,39.78 130.82,39.78 C1_BAT2.1 130.95,39.65 v131.72,38.88 | v166.42,18.84 165.39,18.84 J3.2 | R_CL1.1 82.25,26.22 81.74,26.22 80.9,27.06 Q2.3 80.77,27.12 78.33,27.12 77.05,28.41 | 77.05,28.41 75.76,28.41 75.05,27.7 74.54,27.7 R9.2 74.41,27.77 v73.51,27.77 | 91.47,49.13 91.82,49.48 R1_PINH1.2 | 91.47,49.13 89.25,46.91 87.84,46.91 R2-PINH1.2 | 86.14,61.85 86.11,61.82 86.11,60.66 87.39,59.38 87.39,58.99 U3.2 87.45,58.86 87.45,55.46 88.19,54.72 | 86.14,61.85 86.3,62.01 86.68,62.01 87.58,62.91 88.42,62.91 D7.2 | 86.14,61.85 85.59,62.4 85.59,63.49 89.51,67.41 89.51,70.81 3V3.TP | v90.92,49.67 91.47,49.13 | v89.77,52.12 89.77,53.14 88.19,54.72 | 88.19,54.72 84.24,50.77 84.24,36.12 82.89,34.77 81.8,34.77 77.11,30.08 77.11,28.54 77.05,28.41 | J4.P4 4.83,90.34 5.47,90.34 6.76,91.63 6.76,100.18 C9.1 6.82,100.3 6.05,101.08 6.05,102.04 6.24,102.23 8.23,102.23 8.88,101.59 R10.2 9,101.65 13.7,101.65 19.8,107.76 20.31,107.76 R_CHANGE.1 20.44,107.82 v21.15,107.82 | 47.17,101.01 47.88,101.01 IC1.2 | 47.17,101.01 45.11,103.07 45.11,107.76 R_RESET.1 44.92,107.82 v44.21,107.82 | 47.36,99.41 52.31,99.41 59.95,107.05 59.95,107.76 R_BOOT.1 | 47.36,99.41 47.17,99.6 47.17,101.01 | U2.2 9.07,45.5 9.07,45.18 12.92,41.32 19.22,41.32 R1.1 19.35,41.39 v20.06,41.39 | 43.64,56.74 38.43,56.74 38.24,56.55 38.24,55.39 36.57,53.72 36.38,53.72 U1.3 36.38,53.53 v36.38,53.02 | 43.64,56.74 44.15,56.23 U1.8 44.15,56.1 44.15,55.01 U1.7 | R6.2 51.15,30.27 49.35,30.27 R7.2 49.16,30.27 v47.88,30.27 | v45.95,30.27 45.24,30.27 R8.2 45.11,30.08 45.11,30.91 35.03,41 35.03,47.3 R5.2 34.96,47.49 34.25,48.2 34.25,49.16 v34.9,49.8
  Top 0.3: 47.36,99.41 47.3,99.28 47.3,60.47 43.7,56.87 43.64,56.74
  Bottom 0.3: v166.42,18.84 151.77,18.84 v131.72,38.88 131.59,38.95 101.72,38.95 91.05,49.61 v90.92,49.67 90.92,50.96 v89.77,52.12 | v45.95,30.27 v47.88,30.27 48,30.21 50.45,27.77 v73.51,27.77 | v36.38,53.02 36.38,51.28 v34.9,49.8 34.77,49.74 18.39,49.74 15.56,46.91 15.56,46.4 20.06,41.9 v20.06,41.39 | v44.21,107.82 v21.15,107.82
32KHZ  (via drill 0.3)
  Top 0.15: v86.49,48.26 86.49,46.91 R2-PINH1.1 | v87.97,55.71 87.97,58.28 88.61,58.93 U3.1 | v18.32,46.72 18,46.4 18,45.56 U2.9
  Bottom 0.15: 86.49,54.11 86.49,54.24 v87.97,55.71 | 86.49,54.11 v86.49,48.26 | v18.32,46.72 23.2,46.72 24.62,45.31 36.89,45.31 45.69,54.11 86.49,54.11
DN
  Top 0.15: 162.88,53.85 163.14,53.59 163.66,53.59 J2.B7 | 162.88,53.85 162.88,54.3 163.14,54.56 163.66,54.56 J2.A7 | D1.4 154.79,49.03 158,49.03 162.82,53.85 162.88,53.85
DP
  Top 0.15: J2.A6 163.72,54.11 164.3,54.11 164.49,54.3 164.49,54.81 164.3,55.01 163.72,55.01 J2.B6 163.66,55.01 163.08,55.01 160.25,52.18 156.2,52.18 154.92,50.9 154.79,50.9 D1.6
EPD_3V3  (via drill 0.3)
  Top 0.3: C7.1 76.34,27.7 77.11,27.7 78.72,26.1 Q2.2 78.91,26.03 81.29,26.03 81.87,25.45 84.05,25.45 | 84.05,25.45 84.24,25.65 84.24,27.7 83.6,28.34 L1.2 | J1.15 84.88,14.14 84.43,14.14 J1.16 84.37,14.27 84.37,14.66 84.24,14.79 84.24,16.71 86.46,18.93 | 86.46,18.93 87.74,20.22 | 87.74,20.22 88.87,21.34 88.87,21.79 EPD_C5.2 | v108.14,16.91 111.48,13.57 EPD_3V3.TP | 87.74,20.22 v91.05,16.91 | 86.46,18.93 84.56,20.83 84.56,23.46 84.11,23.91 84.11,25.32 84.05,25.45
  Bottom 0.3: v91.05,16.91 v108.14,16.91
EPD_3V3_C  (via drill 0.3)
  Top 0.3: v80.52,27.89 78.78,27.89 Q2.1 | v82.89,26.93 R_CL1.2 | v41.52,33.74 20.51,54.75 20.51,63.04 U2.18 | v91.57,28.02 102.17,17.42 111.48,17.42 EPD_3V3_C.TP
  Bottom 0.3: v41.52,33.74 74.6,33.74 80.39,27.96 v80.52,27.89 81.93,27.89 v82.89,26.93 83.02,27 84.5,28.47 91.12,28.47 v91.57,28.02
EPD_BUSY  (via drill 0.3)
  Top 0.15: v87.9,12.73 J1.9 | v90.22,10.42 104.55,10.42 111.87,3.09 EPD_BUSY.TP | v16.2,55.52 10.35,61.37 10.35,63.04 U2.26
  Bottom 0.15: v90.22,10.42 v87.9,12.73 87.84,12.73 87.26,12.15 48.2,12.15 14.85,45.5 14.85,47.17 16.2,48.52 v16.2,55.52
EPD_CS  (via drill 0.3)
  Top 0.15: v86.36,15.49 86.36,14.21 J1.12 | D6.2 v78.33,19.93 78.27,19.93 77.3,18.96 71.07,18.96 70.94,19.09 70.94,19.99 74.54,23.59 R9.1 | v56.29,19.93 52.82,19.93 30.53,42.22 23.59,42.22 20.51,45.31 20.51,45.5 U2.11 | v91.57,23.72 92.79,23.72 104.22,12.28 113.35,12.28 122.54,3.09 124.91,3.09 EPD_CS.TP
  Bottom 0.15: 84.85,17 84.31,17.55 80.71,17.55 v78.33,19.93 v56.29,19.93 | 84.85,17 v86.36,15.49 | 84.85,17 v91.57,23.72
EPD_DC  (via drill 0.3)
  Top 0.15: v87.33,14.92 86.94,14.53 86.94,14.21 J1.11 | v119.84,4.06 120.8,3.09 EPD_DC.TP | v36.18,35.93 30.21,41.9 16.27,41.9 12.92,45.24 12.92,45.5 U2.5
  Bottom 0.15: 90.6,14.92 108.98,14.92 v119.84,4.06 | 90.6,14.92 v87.33,14.92 | v36.18,35.93 85.66,35.93 92.34,29.24 92.34,18.84 90.6,17.1 90.6,14.92
EPD_RST  (via drill 0.3)
  Top 0.15: v87.45,13.37 87.45,14.14 J1.10 | v108.79,10.29 115.98,3.09 EPD_RST.TP | v16.65,55.07 16.65,63.04 U2.21
  Bottom 0.15: v108.79,10.29 90.99,10.29 87.9,13.37 v87.45,13.37 87.45,13.44 86.88,14.02 86.88,16.33 92.02,21.47 92.02,28.22 91.37,28.86 89,28.86 83.66,34.19 26.61,34.19 15.17,45.63 15.17,47.04 16.65,48.52 v16.65,55.07
FLASH_CS  (via drill 0.3)
  Top 0.15: R5.1 35.03,48.71 36.63,48.71 D9.2 36.63,48.84 v36.63,49.61 | v36.38,55.52 36.38,56.16 U1.1 | v23.14,47.17 21.79,45.82 21.79,45.56 U2.12
  Bottom 0.15: v36.38,55.52 36.38,54.94 37.15,54.17 37.15,50.12 v36.63,49.61 36.57,49.61 36.31,49.35 26.93,49.35 24.75,47.17 v23.14,47.17
GDR  (via drill 0.3)
  Top 0.15: v84.76,16.46 90.15,16.46 91.37,15.24 91.37,14.21 J1.2 | v68.76,16.46 67.92,15.62 Q3.1 67.86,15.56 66.57,14.27 66.57,13.18 R4.1
  Bottom 0.15: v68.76,16.46 v84.76,16.46
GND  (via drill 0.3)
  Top 0.3: C6.2 68.31,107.82 66.12,107.82 65.8,108.14 BOOT_BUTTON.2 65.61,108.21 62.27,108.21 BOOT_BUTTON.1 62.14,108.27 62.01,108.27 60.53,109.75 55.46,109.75 53.21,107.5 C5.2 | IC1.3 47.94,100.05 49.61,100.05 50.19,100.62 52.24,100.62 C_DELAY.2 52.37,100.75 53.08,101.46 53.08,107.44 52.89,107.63 C5.2 | C5.2 52.82,107.82 51.09,107.82 50.77,108.14 RESET_BUTTON.2 50.64,108.21 47.3,108.21 RESET_BUTTON.1 47.17,108.27 47.04,108.27 45.82,109.49 45.82,109.56 45.63,109.75 29.82,109.75 27.96,107.89 C10.2 27.83,107.82 26.1,107.82 25.77,108.14 CHANGE_BUTTON.2 25.65,108.21 22.31,108.21 CHANGE_BUTTON.1 22.18,108.08 14.21,100.11 | U2.29_1 12.28,51.6 12.28,52.76 U2.29_2 | U2.29_3 12.28,54.04 12.28,52.95 U2.29_2 | U2.29_1 12.41,51.54 U2.29_4 13.63,51.54 14.72,51.54 U2.29_7 14.85,51.47 23.01,51.47 v26.35,48.13 | U2.29_2 12.41,52.82 13.5,52.82 U2.29_5 13.63,52.82 14.72,52.82 U2.29_8 14.79,52.95 14.79,54.04 U2.29_9 | U2.29_6 12.41,54.04 U2.29_3 | U2.1 7.85,45.56 7.85,47.04 12.22,51.41 U2.29_1 | U2.29_3 12.15,54.17 7.85,58.48 7.85,63.04 U2.28 7.66,63.1 7.08,63.1 3.29,66.89 2.32,66.89 1.23,67.99 1.23,82.12 J4.G3 1.17,82.25 1.17,86.36 | J4.G4 2.19,95.36 2.19,94.91 4.57,92.53 4.76,92.53 J4.P6 4.51,92.4 1.17,89.06 1.17,86.36 | 14.53,87.01 15.37,86.17 15.37,85.27 J4.G1 | 14.53,87.01 14.53,90.02 15.37,90.86 J4.G2 15.37,91.05 15.37,91.89 14.27,92.98 14.27,99.98 14.21,100.11 | C9.2 6.88,101.53 8.11,100.3 8.11,99.85 8.55,99.41 11.64,99.41 D8.1 11.77,99.47 12.41,100.11 14.21,100.11 | 1.17,86.36 13.82,86.36 14.4,86.94 14.53,87.01 | U4.9 135.19,53.27 135.19,53.08 134.74,52.63 134.29,52.63 U4.4 134.23,52.44 134.23,48.39 132.49,46.66 131.34,46.66 128.16,49.84
  Top 0.3: U4.9 135.32,53.08 136.16,53.08 U4.6 136.35,53.02 145.92,53.02 148.17,50.77 C5_USB.2 148.3,50.64 150.61,50.64 151.32,49.93 152.22,49.93 D1.2 | U4.1 134.29,54.04 134.68,54.04 135.26,53.47 U4.9 | 128.16,49.84 127.23,48.9 126.9,48.9 U5.2 126.78,48.78 126.2,48.78 125.3,47.88 125.3,45.56 124.2,44.47 R2_BAT.1 124.14,44.28 124.14,42.29 121.38,39.52 IC4.2 | 128.16,49.84 128.45,50.12 128.45,55.01 C2_BAT.2 | C1_BAT2.2 130.82,38.43 129.15,38.43 127.61,36.89 C3.- 127.48,36.95 123.76,36.95 121.31,39.39 121.12,39.39 IC4.2 | 119.19,39.46 120.99,39.46 IC4.2 | 119.19,39.46 117.33,39.46 116.95,39.07 116.05,39.07 R1_PWRUSB.1 115.92,39.2 115.21,39.91 115.21,40.81 | 119.19,39.46 119.19,36.5 C1_BAT1.2 | 115.21,40.81 116.24,41.84 116.24,49.55 C1_BAT.2 | C2.2 156.46,5.79 157.61,5.79 C1.2 157.74,5.86 158.45,6.56 158.45,8.55 157.23,9.78 SENSOR2.5 | 156.01,10.67 155.62,10.29 155.62,9.9 SENSOR2.7 | 156.01,10.67 156.72,10.67 157.16,10.23 157.16,9.9 SENSOR2.5 | SENSOR2.1 154.79,12.8 154.79,11.96 155.94,10.8 156.01,10.67 | SENSOR2.5 157.29,10.29 164.81,17.81 J3.1 164.75,17.94 164.36,18.32 164.36,49.1 J2.MP3 | R2-USB1.1 153.5,46.08 153.5,47.3 R2-USB.2 153.44,47.43 153.44,49.16 152.73,49.87 D1.2 | D1.2 152.35,50 152.67,50 153.18,50.51 153.18,50.64 155.3,52.76 156.59,52.76 C4_USB.2 156.78,52.76 158.45,52.76 163.01,57.32 163.59,57.32 J2.B1 163.72,57.38 163.72,57.64 J2.A12 163.78,57.77 163.78,58.93 164.23,59.38 J2.MP4 164.36,59.44 166.29,59.44 | J2.B12 163.72,51.22 163.72,50.96 J2.A1 163.78,50.83 163.78,49.67 164.23,49.23 J2.MP3 | 166.29,49.23 164.36,49.23 J2.MP3
  Top 0.3: 166.29,49.23 168.15,49.23 J2.MP1 | 166.29,59.44 168.15,59.44 J2.MP2 | 166.29,59.44 166.29,49.23 | 37.6,52.44 38.37,52.44 40.23,54.3 U1.9 | 37.6,52.44 36.38,52.44 U1.4 | D10.1 51.02,32.52 49.16,32.52 D11.1 48.97,32.52 47.36,32.52 | 47.36,32.52 44.98,32.52 D12.1 44.92,32.65 36.7,40.87 36.7,47.23 D9.1 36.57,47.36 v35.86,48.07 | v37.6,52.24 37.6,52.44 | R2.1 69.59,11.45 67.92,13.12 R4.2 67.73,13.05 67.02,12.35 66.89,12.35 65.93,11.38 65.93,11.06 SJ1.1 | GND_1.TP 59.95,2.39 63.81,2.39 GND.TP 63.87,2.52 65.8,4.44 65.8,9.97 | 65.8,9.97 65.8,10.93 SJ1.1 | 92.34,53.72 92.34,58.99 C8.2 | 92.34,53.72 94.39,51.67 C10_SUPERCAP.1 | 92.34,53.72 92.21,53.66 90.15,51.6 86.36,51.6 84.88,50.12 84.88,49.67 U3.13 84.95,49.55 84.95,40.87 | EPD_C8.1 82.12,23.14 EPD_C9.1 81.93,23.14 EPD_C10.1 80.19,23.2 79.81,23.2 | EPD_C12.1 71.65,19.61 72.93,19.61 EPD_C11.1 73.06,19.67 76.66,23.27 D6.1 | C7.2 76.34,26.42 76.34,23.78 76.79,23.33 D6.1 | 79.81,23.2 78.97,24.04 77.56,24.04 76.92,23.4 D6.1 | EPD_C7.1 85.46,23.14 87.13,23.14 EPD_C6.1 87.33,23.14 88.87,23.14 EPD_C5.1 89.06,23.14 89.83,23.14 90.22,23.53 90.34,23.59 | 90.34,23.59 90.34,28.73 D3.1 90.22,28.86 86.81,32.26 86.81,35.35 84.95,37.21 84.95,40.87 | 90.34,23.59 90.67,23.27 EPD_C2.2 90.73,23.14 92.27,23.14 EPD_C1.2 92.34,23.01 93.04,22.31 93.04,11.96 92.92,11.83 J1.MP1 92.85,11.7 90.99,11.7 90.15,12.54 88.55,12.54 88.42,12.47 | 85.14,11.7 87.65,11.7 88.42,12.47 | 85.14,11.7 79.42,11.7 J1.MP2 79.29,11.57 78.2,11.57 76.6,9.97 65.8,9.97 | 88.42,12.47 J1.8 | v84.43,13.18 83.92,13.7 J1.17 | 85.14,11.7 v85.14,12.6 | v80.39,15.24 79.55,16.07 79.55,22.31 79.74,22.5 79.74,23.08 79.81,23.2
  Top 0.3: 47.36,32.52 47.36,29.63 65.55,11.45 65.8,11.45 SJ1.1 | 84.95,40.87 115.08,40.87 115.21,40.81
  Bottom 0.3: v37.6,52.24 37.6,49.8 v35.86,48.07 35.73,48.13 v26.35,48.13 | v85.14,12.6 84.56,13.18 v84.43,13.18 84.31,13.25 82.31,15.24 v80.39,15.24
  pour Top: 77.03,10 77.05,10.02 95.29,10.02 95.31,10 95.33,9.98 95.35,9.96 95.35,0.08 170.13,0.08 170.13,67.13 92.19,67.13 92.17,67.15 92.15,67.17 92.13,67.19 92.13,111.13 68.34,111.13 68.34,110.44 68.32,110.42 68.3,110.4 68.28,110.38 19.82,110.38 19.8,110.4 19.78,110.42 19.76,110.44 19.76,111.13 0.09,111.13 0.09,63.46 6.32,63.46 6.34,63.44 6.36,63.42 6.38,63.4 6.38,45.22 6.36,45.2 6.34,45.18 6.32,45.16 0.08,45.16 0.08,0.09 76.99,0.09 76.99,9.96 77.01,9.98
  pour Bottom: 77.03,10.02 77.05,10.04 95.29,10.04 95.31,10.02 95.33,10 95.35,9.98 95.35,0.08 170.13,0.08 170.13,67.13 92.19,67.13 92.17,67.15 92.15,67.17 92.13,67.19 92.13,111.13 68.34,111.13 68.34,110.44 68.32,110.42 68.3,110.4 68.28,110.38 19.82,110.38 19.8,110.4 19.78,110.42 19.76,110.44 19.76,111.13 0.09,111.13 0.09,63.46 6.32,63.46 6.34,63.44 6.36,63.42 6.38,63.4 6.38,45.22 6.36,45.2 6.34,45.18 6.32,45.16 0.08,45.16 0.08,0.09 76.99,0.09 76.99,9.98 77.01,10
GPIO8  (via drill 0.3)
  Top 0.15: v19.22,44.02 19.22,42.67 R1.2 | v18.71,47.17 18.71,46.98 19.16,46.53 19.16,45.56 U2.10
  Bottom 0.15: v19.22,44.02 19.22,45.18 17.87,46.53 17.87,46.91 18.13,47.17 v18.71,47.17
I2C_PW  (via drill 0.3)
  Top 0.3: R2-PINH.2 154.02,7.08 155.17,7.08 R1_PINH.2 | R1_PINH.2 155.37,7.08 156.39,7.08 C2.1 156.52,7.08 157.61,7.08 C1.1 | 154.79,9.07 154.79,7.21 R1_PINH.2 | 154.79,9.07 154.79,9.84 SENSOR2.8 154.72,10.03 154.21,10.55 154.21,13.37 | 154.21,13.37 154.47,13.63 155.04,13.63 155.56,13.12 155.56,12.86 SENSOR2.2 | 154.79,9.07 155.88,9.07 156.33,9.52 156.33,9.84 SENSOR2.6 | v82.38,51.09 33.36,51.09 21.79,62.65 21.79,63.04 U2.17 | v154.08,13.44 154.21,13.37
  Bottom 0.3: v82.38,51.09 82.51,51.09 120.16,13.44 v154.08,13.44
INT_RTC  (via drill 0.3)
  Top 0.15: v91.82,52.5 91.82,50.9 R1_PINH1.1 | v86.68,57.64 86.68,58.41 86.17,58.93 U3.3 86.11,58.99 86.11,59.31 85.2,60.21 85.2,68.18 89.51,72.48 89.51,73.96 INT_RTC.TP | v28.73,45.76 26.87,47.62 18.51,47.62 16.71,45.82 16.71,45.56 U2.8
  Bottom 0.15: v91.82,52.5 v86.68,57.64 48.78,57.64 36.89,45.76 v28.73,45.76
IO/BOOT  (via drill 0.3)
  Top 0.15: BOOT_BUTTON.4 62.27,109.69 65.74,109.69 BOOT_BUTTON.3 65.8,109.62 67.79,109.62 68.31,109.11 C6.1 68.37,109.04 69.01,108.4 69.01,107.31 68.89,107.18 61.69,107.18 | 61.69,107.18 60.02,108.85 60.02,109.04 R_BOOT.2 | v24.36,69.79 24.36,63.1 U2.15 | v61.69,107.12 61.69,107.18
  Bottom 0.15: v61.69,107.12 v24.36,69.79
IO/CHANGE  (via drill 0.3)
  Top 0.15: C10.1 27.83,109.11 26.29,109.11 25.77,109.62 CHANGE_BUTTON.3 25.71,109.69 22.31,109.69 CHANGE_BUTTON.4 22.24,109.62 21.73,109.11 20.38,109.11 R_CHANGE.2 20.31,109.04 v14.14,102.87 | v14.14,85.91 14.14,63.1 U2.23
  Bottom 0.15: v14.14,102.87 v14.14,85.91
MISO  (via drill 0.3)
  Top 0.15: v45.82,29.44 45.18,28.79 R8.1 | v45.69,33.23 44.98,33.93 D12.2 44.92,34 44.86,34.06 44.86,42.03 36.7,50.19 v36.7,50.32 | U1.2 36.38,54.94 v36.38,54.3 35.99,54.3 35.67,53.98 35.67,52.12 35.99,51.79 41.9,51.79 42.22,52.12 42.22,52.7 43.64,54.11 44.28,54.11 81.09,90.92 81.09,101.59 MISO.TP | v19.99,54.62 16.46,54.62 9.07,62.01 9.07,63.04 U2.27 9,63.1 9,63.36 v6.24,66.12 | v6.24,92.53 5.21,93.56 5.02,93.56 J4.P7
  Bottom 0.15: v45.82,29.44 45.82,29.76 45.5,30.08 45.5,33.03 v45.69,33.23 | v36.7,50.32 36.82,50.45 36.82,53.21 36.38,53.66 v36.38,54.3 36.31,54.3 35.99,54.62 v19.99,54.62 | v6.24,66.12 v6.24,92.53
MOSI  (via drill 0.3)
  Top 0.15: J1.14 85.4,14.14 85.4,13.5 84.63,12.73 76.6,12.73 72.42,16.91 66.32,16.91 64.65,15.24 63.04,15.24 49.35,28.92 R7.1 49.74,28.6 50.77,29.63 51.73,29.63 51.86,29.76 51.86,32.97 51.54,33.29 49.8,33.29 49.16,33.93 D11.2 49.1,34 v46.72,36.38 | v45.5,51.92 45.15,52.28 | 45.15,52.28 45.05,52.37 44.21,52.37 U1.5 | U2.7 15.43,45.56 15.43,46.01 v16.07,46.66 16.07,46.72 v12.86,49.93 | v4.25,88.48 4.96,89.19 J4.P3 | 45.15,52.28 88.16,95.29 88.16,101.59 MOSI.TP
  Bottom 0.15: v45.5,51.92 45.5,40.81 45.98,40.33 | 45.98,40.33 46.72,39.59 v46.72,36.38 | v16.07,46.66 16.07,46.53 22.69,39.91 45.56,39.91 45.98,40.33 | v4.25,88.48 4.25,66.32 12.86,57.71 v12.86,49.93
N$1  (via drill 0.3)
  Top 0.15: v156.07,48.58 154.85,47.36 R2-USB.1 | v162.75,55.65 163.14,56.04 163.66,56.04 J2.B5
  Bottom 0.15: v156.07,48.58 156.07,48.97 v162.75,55.65
N$2
  Top 0.15: R2-USB1.2 154.85,46.08 156.14,46.08 163.08,53.02 163.66,53.02 J2.A5
N$3  (via drill 0.3)
  Top 0.15: 120.99,37.15 120.99,38.5 IC4.3 | 120.99,37.15 119.58,35.73 118.55,35.73 117.91,36.38 C1_BAT1.1 117.84,36.5 117.84,38.5 117.78,38.56 D2.1 117.78,38.5 115.47,38.5 114.89,39.07 v114.89,39.46 | v118.55,40.42 120.99,40.42 IC4.1 | Q1.2 132.88,45.24 132.88,39.33 129.15,35.6 122.6,35.6 121.06,37.15 120.99,37.15
  Bottom 0.15: v118.55,40.42 115.85,40.42 v114.89,39.46
N$4
  Top 0.15: C4.1 96.26,32.26 93.88,32.26 D4.1 93.82,32.26 93.82,28.79 D3.2
N$5
  Top 0.15: CHG_LED.C 120.86,49.61 122.09,48.39 R1_BAT.2
N$6  (via drill 0.3)
  Top 0.15: v121.51,47.62 121.51,47.68 120.86,48.33 R1_BAT.1 | v125.81,47.62 126.52,47.62 126.78,47.88 U5.1
  Bottom 0.15: v125.81,47.62 v121.51,47.62
N$7
  Top 0.15: J1.22 81.35,14.21 81.35,20.76 80.32,21.79 EPD_C10.2
N$8
  Top 0.15: R2_BAT.2 124.2,45.76 U5.5
N$9
  Top 0.15: IC1.5 50.77,101.91 52.24,101.91 C_DELAY.1
N$10
  Top 0.15: J1.4 90.47,14.14 90.47,12.86 90.73,12.6 91.25,12.6 92.27,13.63 92.27,21.79 EPD_C1.1
N$11  (via drill 0.3)
  Top 0.15: v89.96,16.01 89.96,14.21 J1.5 | v89.96,18.77 89.96,21.08 90.67,21.79 EPD_C2.1
  Bottom 0.15: v89.96,18.77 v89.96,16.01
N$12
  Top 0.15: R_CAPACITOR.2 88.1,61.24 88.1,61.43 89.06,62.4 89.06,63.49 88.93,63.62 87.01,63.62 86.36,62.98 D7.1
N$19  (via drill 0.3)
  Top 0.15: v83.47,18.06 83.47,14.21 J1.18 | v86.49,21.08 87.13,21.73 EPD_C6.2
  Bottom 0.15: v86.49,21.08 v83.47,18.06
N$20  (via drill 0.3)
  Top 0.15: v82.96,18.96 82.96,14.21 J1.19 | v85.08,21.08 85.08,21.41 85.4,21.73 EPD_C7.2
  Bottom 0.15: v85.08,21.08 v82.96,18.96
N$21
  Top 0.15: J1.20 82.44,14.21 82.44,20.57 83.66,21.79 EPD_C8.2
N$25
  Top 0.15: J1.24 80.39,14.21 75.7,14.21 71.65,18.26 EPD_C12.2
PREVGH  (via drill 0.3)
  Top 0.15: J1.21 81.93,14.21 81.93,21.86 EPD_C9.2 82.06,21.86 v82.7,22.5 | v86.43,26.22 86.43,33.55 85.33,34.64 85.33,35.41 D5.1
  Bottom 0.15: v82.7,22.5 v86.43,26.22
PREVGL  (via drill 0.3)
  Top 0.15: 80.64,14.79 80.9,14.53 80.9,14.21 J1.23 | 80.64,14.79 76.47,14.79 73,18.26 EPD_C11.2 | v90.86,27.96 91.12,28.22 91.12,29.18 90.34,29.95 90.34,32.26 D4.2 | v80.9,18 80.9,15.11 80.64,14.85 80.64,14.79
  Bottom 0.15: v80.9,18 v90.86,27.96
RESE  (via drill 0.3)
  Top 0.15: v90.92,13.05 90.92,14.14 J1.3 | v89.9,12.03 88.74,12.03 v88.35,11.64 | v77.24,11.64 72.93,15.94 71.91,15.94 71.26,15.3 R3.1 71.2,15.3 70.94,15.56 69.21,15.56 Q3.2
  Bottom 0.15: v89.9,12.03 v90.92,13.05 | v77.24,11.64 v88.35,11.64
RESE'
  Top 0.15: R3.2 72.48,15.24 69.98,12.73 69.66,12.73 R2.2 69.98,12.67 70.3,12.35 70.3,10.93 70.17,10.8 69.14,10.8 68.95,11 67.47,11 SJ1.2
RESET  (via drill 0.3)
  Top 0.15: C5.1 52.82,109.11 51.28,109.11 50.77,109.62 RESET_BUTTON.3 50.7,109.69 48.26,109.69 | 48.26,109.69 47.3,109.69 RESET_BUTTON.4 | R_RESET.2 45.11,109.04 45.76,108.4 45.76,108.14 47.88,106.02 47.88,101.91 IC1.1 47.88,101.85 v47.1,101.85 | v10.35,46.72 10.35,45.56 U2.3 | v48.26,108.91 48.26,109.69
  Bottom 0.15: v10.35,46.72 15.75,52.12 15.75,70.49 v47.1,101.85 47.1,101.91 48.26,103.07 v48.26,108.91
RTC_RST
  Top 0.15: U2.16 23.08,63.04 23.08,62.78 34.38,51.47 78.52,51.47 84.82,57.77 84.82,58.93 U3.4
RX
  Top 0.15: U2.24 12.86,63.1 12.86,63.3 4.38,71.78 2.9,71.78 RX.TP
SCK  (via drill 0.3)
  Top 0.15: v84.76,15.69 85.85,14.6 85.85,14.21 J1.13 | v64.45,15.69 51.22,28.92 R6.1 51.41,28.79 52.18,29.57 52.18,33.1 51.28,34 51.09,34 D10.2 51.02,34.06 45.31,39.78 v45.31,40.36 | v45.05,52.82 44.21,53.66 U1.6 44.28,53.66 84.63,94.01 84.63,101.59 SCK.TP | v19.86,44.47 14.98,44.47 14.14,45.31 14.14,45.5 U2.6 14.14,45.63 14.14,45.82 11.9,48.07 v11.9,48.9 | v3.8,86.88 3.8,90.73 4.44,91.37 4.96,91.37 J4.P5
  Bottom 0.15: v64.45,15.69 v84.76,15.69 | 45.05,44.47 45.05,40.62 v45.31,40.36 | 45.05,44.47 v45.05,52.82 | 45.05,44.47 v19.86,44.47 | v3.8,86.88 3.8,66.32 11.9,58.22 v11.9,48.9
SCL  (via drill 0.3)
  Top 0.15: SENSOR2.4 157.1,12.86 157.1,13.12 156.2,14.02 154.02,14.02 153.31,13.31 153.31,6.63 153.95,5.98 153.95,5.79 R2-PINH.1 154.02,5.73 154.15,5.73 154.98,4.89 158.45,4.89 167.19,13.63 167.19,19.22 165.65,20.76 165.39,20.76 J3.4 165.32,20.83 v165.32,25.97 | v137.76,53.53 136.22,53.53 U4.7 | v19.99,60.79 18,62.78 18,63.04 U2.20 | v80.07,53.66 v72.93,60.79 | v87.65,48.26 88.61,49.23 88.61,49.61 U3.16
  Bottom 0.15: v165.32,25.97 v137.76,53.53 137.76,53.85 137.18,54.43 94.39,54.43 92.02,52.05 90.47,52.05 89.96,52.57 89.57,52.57 87.65,50.64 v87.65,48.26 87.2,47.81 86.3,47.81 80.45,53.66 v80.07,53.66 | v72.93,60.79 v19.99,60.79
SDA  (via drill 0.3)
  Top 0.15: 160.92,7.94 166.87,13.89 166.87,19.03 166.1,19.8 165.39,19.8 J3.3 | 160.92,7.94 158.19,5.21 155.88,5.21 155.37,5.73 155.24,5.73 R1_PINH.1 | v157.55,11.32 156.39,12.47 156.39,12.8 SENSOR2.3 | v160.89,7.98 160.92,7.94 | 100.08,53.37 92.92,46.21 87.33,46.21 87.2,46.33 87.2,49.42 87.39,49.61 U3.15 | 100.08,53.37 112.13,65.42 128.12,65.42 136.16,57.38 136.16,54.11 U4.8 136.28,54.04 136.35,53.98 v136.99,53.98 | v19.99,61.95 19.22,62.72 19.22,63.04 U2.19 | 100.08,53.37 v94.33,59.12
  Bottom 0.15: v160.89,7.98 158.55,10.32 | 158.55,10.32 v157.55,11.32 | v19.99,61.95 91.5,61.95 v94.33,59.12 | 158.55,10.32 166.87,18.64 166.87,23.78 136.99,53.66 v136.99,53.98
SRC  (via drill 0.3)
  Top 0.15: v87.33,33.61 96.26,33.61 C4.2 | v84.69,33.8 84.43,33.8 83.6,32.97 L1.1 | Q3.3 68.57,17.74 68.57,23.46 80.52,35.41 81.8,35.41 D5.2 81.87,35.48 v82.83,35.48
  Bottom 0.15: v87.33,33.61 84.88,33.61 v84.69,33.8 84.5,33.8 v82.83,35.48
SS_SD  (via drill 0.3)
  Top 0.15: v10.8,100.24 8.94,100.24 R10.1 | D8.2 13.12,99.34 v12.41,98.63 12.41,95.1 5.47,88.16 J4.P2 | v13.31,50.77 13.05,50.77 11.45,49.16 11.45,48.71 11.57,48.58 11.57,45.56 U2.4
  Bottom 0.15: v10.8,100.24 v12.41,98.63 12.41,98.57 13.31,97.67 v13.31,50.77
TX
  Top 0.15: U2.25 11.57,63.1 11.57,63.36 6.76,68.18 2.9,68.18 TX.TP
USB_D+  (via drill 0.3)
  Top 0.3: v136.6,54.88 147.01,54.88 151,50.9 152.22,50.9 D1.1 | v25.13,46.21 25,46.21 24.36,45.56 U2.14
  Bottom 0.3: v136.6,54.88 90.22,54.88 86.94,58.16 47.36,58.16 35.48,46.27 25.2,46.27 v25.13,46.21
USB_D-  (via drill 0.3)
  Top 0.3: v149.13,49.67 149.78,49.03 152.22,49.03 D1.3 | v23.85,46.72 23.08,45.95 23.08,45.56 U2.13
  Bottom 0.3: v149.13,49.67 142.58,49.67 133.65,58.61 47.17,58.61 35.28,46.72 v23.85,46.72
VBAT
  Top 0.3: U4.2 134.29,53.53 134.29,53.08 U4.3 134.1,53.08 133.84,53.08 132.72,51.96 | 132.72,51.96 131.98,51.22 131.98,47.43 Q1.3 | U5.3 126.84,49.8 127.1,50.06 127.1,55.01 C2_BAT.1 127.23,55.14 127.61,55.52 127.61,55.78 | 127.61,55.78 127.61,64.2 VBAT.TP | 132.72,51.96 128.9,55.78 127.61,55.78
VBUS  (via drill 0.3)
  Top 0.3: R1_PWRUSB.2 116.05,40.42 117.52,40.42 117.72,40.62 D2.2 117.78,40.81 117.78,49.48 C1_BAT.1 117.65,49.61 119.58,49.61 120.29,50.32 121.64,50.32 122.21,49.74 CHG_LED.A 122.34,49.67 124.08,49.67 124.14,49.74 U5.4 | VBUS.TP 124.33,64.13 124.33,49.8 U5.4 | C4_USB.1 156.59,51.41 155.11,49.93 154.79,49.93 D1.5 154.66,49.87 v153.5,49.87 | 146.37,47.49 148.23,49.35 C5_USB.1 148.43,49.35 148.88,48.9 v149.13,48.9 | 146.37,47.49 145.09,46.21 132.49,46.21 131.59,45.31 131.02,45.31 Q1.1 130.89,45.37 v130.18,45.37 | 146.37,47.49 150.42,43.44 PFMF.050.1.2 | v125.81,49.74 124.46,49.74 U5.4
  Bottom 0.3: v153.5,49.87 150.1,49.87 v149.13,48.9 | v130.18,45.37 v125.81,49.74
VRTC
  Top 0.3: R_CAPACITOR.1 86.81,61.18 87.65,60.34 92.27,60.34 C8.1 92.4,60.21 95.42,57.19 95.42,50.57 94.46,49.61 C10_SUPERCAP.2 94.39,49.48 93.11,49.48 92.4,50.19 89.83,50.19 89.06,50.96 87.01,50.96 86.17,50.12 86.17,49.67 U3.14
VUSB
  Top 0.3: J2.A9 163.72,56.81 163.72,56.61 J2.B4 163.85,56.55 164.36,56.55 164.88,56.04 164.88,52.57 164.43,52.12 163.85,52.12 J2.B9 163.72,52.05 163.72,51.79 J2.A4 163.59,51.73 163.01,51.73 154.98,43.7 154.98,43.44 PFMF.050.1.1